# Altium PCB main_old.PcbDoc (part 10 of 15)
Units mil, origin at the board's own origin, x right, y up, seen from the top; angles counter-clockwise.
Board outline 8394.55 x 5164.44 mil, 7 copper layers (Top Layer 1, Layer 2, Layer 3, Unused, Layer 4_pow, Layer 5_gnd, Bottom 6+gnd), stack 46.112 mil thick; 363 components, 409 nets, 1750 pads, 991 vias.
Unrouted connection lines stored in the file: 1.
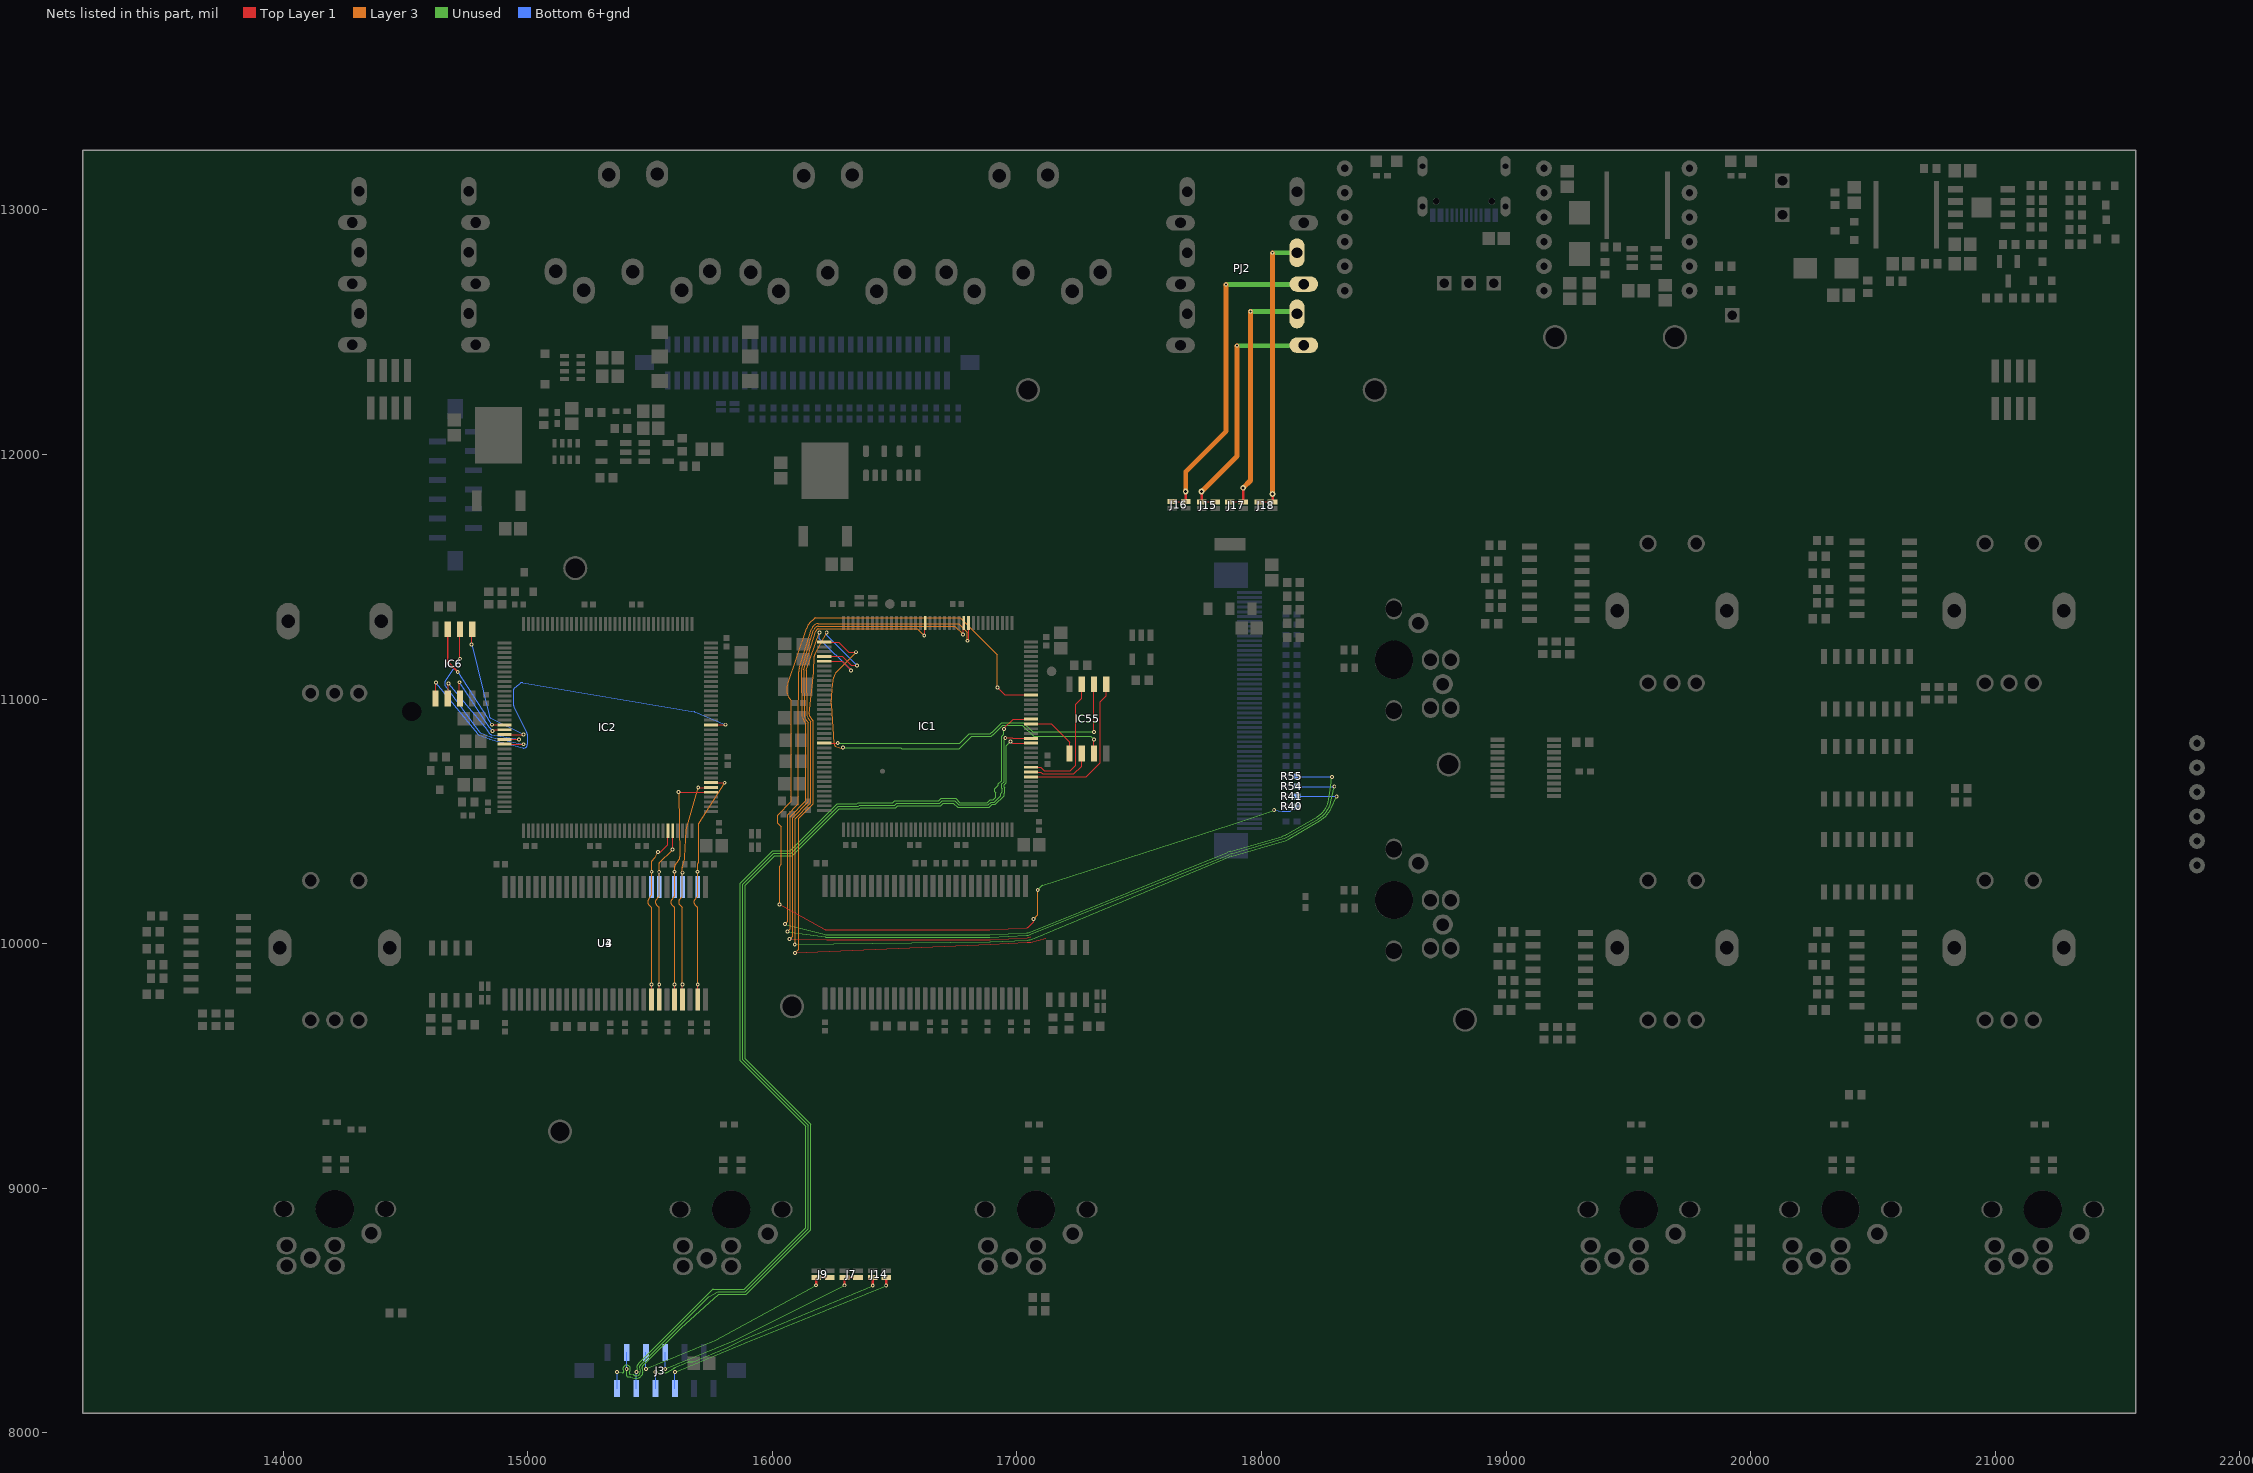
[diagram p13: the nets of this part, all layers, seen from the top]

## Via types
v1: diameter 15.75, hole 7.87, Top Layer 1 to Bottom 6+gnd, tented both sides, 923 vias
v2: diameter 27.56, hole 11.81, Top Layer 1 to Bottom 6+gnd, 45 vias
v3: diameter 23.62/23.62/23.62/23.62/23.62/23.62/23.62 (per signal layer), hole 12, Top Layer 1 to Bottom 6+gnd, tented top, 10 vias
v4: diameter 15.75, hole 7.87, Top Layer 1 to Bottom 6+gnd, 10 vias
v5: diameter 23.62/23.62/23.62/23.62/23.62/23.62/23.62 (per signal layer), hole 12, Top Layer 1 to Bottom 6+gnd, tented bottom, 3 vias

## Nets (pads, with @x,y where several pads share a name; then routed paths per layer and width w, separated by ;. In a path a pad name is that pad's centre, name@x,y a point inside that pad or via, vN(x,y) a via of type N, cw(c..) or ccw(c..) an arc to the next point about the centre after c; other vN are vias at no path point) (continued)
DD11: IC2.67 U3.47 U4.47 | length 1291.6
  Top Layer 1 w5: U3.47@15505.68,9771.4 v1@15505.68,9833.24 ; v1(15531.7,10374.63) 15542.1,10374.63 15572.76,10405.29 IC2.67@15572.82,10461.87
  Layer 3 w5: v1(15505.92,9833.49) 15505.92,10145.64 ; 15505.92,10200.79 cw(c15500.92,10200.88) 15505.15,10198.2 15492.45,10178.18 ; 15505.92,10200.83 15505.92,10293.59 v1(15506.43,10294.1) 15506.43,10336.08 ; v1(15531.7,10374.63) 15520.48,10353.18 ; 15492.45,10178.18 ccw(c15505.43,10169.94) 15494.58,10159.05 ; 15492.45,10178.18 ccw(c15505.43,10169.94) 15494.58,10159.05 ; 15492.45,10178.18 ccw(c15505.43,10169.94) 15494.58,10159.05 ; 15492.45,10178.18 ccw(c15505.43,10169.94) 15494.58,10159.05 ; 15492.45,10178.18 ccw(c15505.43,10169.94) 15494.58,10159.05 ; 15492.45,10178.18 ccw(c15505.43,10169.94) 15494.58,10159.05 ; 15492.45,10178.18 ccw(c15505.43,10169.94) 15494.58,10159.05 ; 15492.45,10178.18 ccw(c15505.43,10169.94) 15494.58,10159.05 ; 15492.45,10178.18 ccw(c15505.43,10169.94) 15494.58,10159.05 ; 15492.45,10178.18 ccw(c15505.43,10169.94) 15494.58,10159.05 ; 15492.45,10178.18 ccw(c15505.43,10169.94) 15494.58,10159.05 ; 15492.45,10178.18 ccw(c15505.43,10169.94) 15494.58,10159.05 ; 15492.45,10178.18 ccw(c15505.43,10169.94) 15494.58,10159.05 ; 15492.45,10178.18 ccw(c15505.43,10169.94) 15494.58,10159.05 ; 15492.45,10178.18 ccw(c15505.43,10169.94) 15494.58,10159.05 ; 15492.45,10178.18 ccw(c15505.43,10169.94) 15494.58,10159.05 ; 15494.58,10159.05 15504.47,10149.12 ; 15504.47,10149.12 cw(c15500.92,10145.59) 15505.92,10145.68 ; 15504.47,10149.12 cw(c15500.92,10145.59) 15505.92,10145.68 ; 15504.47,10149.12 cw(c15500.92,10145.59) 15505.92,10145.68 ; 15504.47,10149.12 cw(c15500.92,10145.59) 15505.92,10145.68 ; 15504.47,10149.12 cw(c15500.92,10145.59) 15505.92,10145.68 ; 15504.47,10149.12 cw(c15500.92,10145.59) 15505.92,10145.68 ; 15504.47,10149.12 cw(c15500.92,10145.59) 15505.92,10145.68 ; 15504.47,10149.12 cw(c15500.92,10145.59) 15505.92,10145.68 ; 15504.47,10149.12 cw(c15500.92,10145.59) 15505.92,10145.68 ; 15504.47,10149.12 cw(c15500.92,10145.59) 15505.92,10145.68 ; 15504.47,10149.12 cw(c15500.92,10145.59) 15505.92,10145.68 ; 15504.47,10149.12 cw(c15500.92,10145.59) 15505.92,10145.68 ; 15504.47,10149.12 cw(c15500.92,10145.59) 15505.92,10145.68 ; 15504.47,10149.12 cw(c15500.92,10145.59) 15505.92,10145.68 ; 15504.47,10149.12 cw(c15500.92,10145.59) 15505.92,10145.68 ; 15504.47,10149.12 cw(c15500.92,10145.59) 15505.92,10145.68 ; 15506.43,10336.08 cw(c15511.43,10336.08) 15507.87,10339.59 ; 15506.43,10336.08 cw(c15511.43,10336.08) 15507.87,10339.59 ; 15506.43,10336.08 cw(c15511.43,10336.08) 15507.87,10339.59 ; 15506.43,10336.08 cw(c15511.43,10336.08) 15507.87,10339.59 ; 15506.43,10336.08 cw(c15511.43,10336.08) 15507.87,10339.59 ; 15506.43,10336.08 cw(c15511.43,10336.08) 15507.87,10339.59 ; 15506.43,10336.08 cw(c15511.43,10336.08) 15507.87,10339.59 ; 15506.43,10336.08 cw(c15511.43,10336.08) 15507.87,10339.59 ; 15506.43,10336.08 cw(c15511.43,10336.08) 15507.87,10339.59 ; 15506.43,10336.08 cw(c15511.43,10336.08) 15507.87,10339.59 ; 15506.43,10336.08 cw(c15511.43,10336.08) 15507.87,10339.59 ; 15506.43,10336.08 cw(c15511.43,10336.08) 15507.87,10339.59 ; 15506.43,10336.08 cw(c15511.43,10336.08) 15507.87,10339.59 ; 15506.43,10336.08 cw(c15511.43,10336.08) 15507.87,10339.59 ; 15506.43,10336.08 cw(c15511.43,10336.08) 15507.87,10339.59 ; 15506.43,10336.08 cw(c15511.43,10336.08) 15507.87,10339.59 ; 15507.87,10339.59 15517.74,10349.46 ; 15517.74,10349.46 ccw(c15506.85,10360.32) 15520.48,10353.19 ; 15517.74,10349.46 ccw(c15506.85,10360.32) 15520.48,10353.19 ; 15517.74,10349.46 ccw(c15506.85,10360.32) 15520.48,10353.19 ; 15517.74,10349.46 ccw(c15506.85,10360.32) 15520.48,10353.19 ; 15517.74,10349.46 ccw(c15506.85,10360.32) 15520.48,10353.19 ; 15517.74,10349.46 ccw(c15506.85,10360.32) 15520.48,10353.19 ; 15517.74,10349.46 ccw(c15506.85,10360.32) 15520.48,10353.19 ; 15517.74,10349.46 ccw(c15506.85,10360.32) 15520.48,10353.19 ; 15517.74,10349.46 ccw(c15506.85,10360.32) 15520.48,10353.19 ; 15517.74,10349.46 ccw(c15506.85,10360.32) 15520.48,10353.19 ; 15517.74,10349.46 ccw(c15506.85,10360.32) 15520.48,10353.19 ; 15517.74,10349.46 ccw(c15506.85,10360.32) 15520.48,10353.19 ; 15517.74,10349.46 ccw(c15506.85,10360.32) 15520.48,10353.19 ; 15517.74,10349.46 ccw(c15506.85,10360.32) 15520.48,10353.19 ; 15517.74,10349.46 ccw(c15506.85,10360.32) 15520.48,10353.19 ; 15517.74,10349.46 ccw(c15506.85,10360.32) 15520.48,10353.19
  Bottom 6+gnd w5: U4.47@15505.68,10232.03 15506.43,10232.78 v1(15506.43,10294.1)
DD12: IC2.68 U3.48 U4.48 | length 1210.8
  Top Layer 1 w5: U3.48@15537.17,9771.4 v1@15537.17,9833.24 ; v1(15591.7,10384.63) 15592.07,10385 15592.07,10461.18 IC2.68@15592.33,10461.44
  Layer 3 w5: v1(15537.42,9833.49) 15537.42,10145.64 ; 15537.42,10195.56 15537.42,10293.63 v1(15537.18,10293.87) 15536.93,10294.12 15536.93,10327.78 ; v1(15591.7,10384.63) 15538.37,10331.3 ; 15525.41,10180.13 ccw(c15536.93,10169.94) 15526.06,10159.07 ; 15525.41,10180.13 ccw(c15536.93,10169.94) 15526.06,10159.07 ; 15525.41,10180.13 ccw(c15536.93,10169.94) 15526.06,10159.07 ; 15525.41,10180.13 ccw(c15536.93,10169.94) 15526.06,10159.07 ; 15525.41,10180.13 ccw(c15536.93,10169.94) 15526.05,10159.07 ; 15525.41,10180.13 ccw(c15536.93,10169.94) 15526.05,10159.07 ; 15525.41,10180.13 ccw(c15536.93,10169.94) 15526.05,10159.07 ; 15525.41,10180.13 ccw(c15536.93,10169.94) 15526.05,10159.07 ; 15525.41,10180.13 ccw(c15536.93,10169.94) 15526.05,10159.07 ; 15525.41,10180.13 ccw(c15536.93,10169.94) 15526.05,10159.07 ; 15525.41,10180.13 ccw(c15536.93,10169.94) 15526.05,10159.07 ; 15525.41,10180.13 ccw(c15536.93,10169.94) 15526.05,10159.07 ; 15525.41,10180.13 15536.16,10192.29 ; 15526.06,10159.07 15535.95,10149.17 ; 15535.95,10149.17 cw(c15532.42,10145.64) 15537.42,10145.67 ; 15535.95,10149.17 cw(c15532.42,10145.64) 15537.42,10145.67 ; 15535.95,10149.17 cw(c15532.42,10145.64) 15537.42,10145.67 ; 15535.95,10149.17 cw(c15532.42,10145.64) 15537.42,10145.67 ; 15535.95,10149.17 cw(c15532.42,10145.64) 15537.42,10145.67 ; 15535.95,10149.17 cw(c15532.42,10145.64) 15537.42,10145.67 ; 15535.95,10149.17 cw(c15532.42,10145.64) 15537.42,10145.67 ; 15535.95,10149.17 cw(c15532.42,10145.64) 15537.42,10145.67 ; 15535.95,10149.17 cw(c15532.42,10145.64) 15537.42,10145.67 ; 15535.95,10149.17 cw(c15532.42,10145.64) 15537.42,10145.67 ; 15535.95,10149.17 cw(c15532.42,10145.64) 15537.42,10145.67 ; 15535.95,10149.17 cw(c15532.42,10145.64) 15537.42,10145.67 ; 15535.95,10149.17 cw(c15532.42,10145.64) 15537.42,10145.67 ; 15535.95,10149.17 cw(c15532.42,10145.64) 15537.42,10145.67 ; 15535.95,10149.17 cw(c15532.42,10145.64) 15537.42,10145.67 ; 15535.95,10149.17 cw(c15532.42,10145.64) 15537.42,10145.67 ; 15536.16,10192.29 ccw(c15532.42,10195.6) 15537.42,10195.51 ; 15536.16,10192.29 ccw(c15532.42,10195.6) 15537.42,10195.51 ; 15536.16,10192.29 ccw(c15532.42,10195.6) 15537.42,10195.51 ; 15536.16,10192.29 ccw(c15532.42,10195.6) 15537.42,10195.51 ; 15536.16,10192.29 ccw(c15532.42,10195.6) 15537.42,10195.51 ; 15536.16,10192.29 ccw(c15532.42,10195.6) 15537.42,10195.51 ; 15536.16,10192.29 ccw(c15532.42,10195.6) 15537.42,10195.51 ; 15536.16,10192.29 ccw(c15532.42,10195.6) 15537.42,10195.51 ; 15536.16,10192.29 ccw(c15532.42,10195.6) 15537.42,10195.51 ; 15536.16,10192.29 ccw(c15532.42,10195.6) 15537.42,10195.51 ; 15536.16,10192.29 ccw(c15532.42,10195.6) 15537.42,10195.51 ; 15536.16,10192.29 ccw(c15532.42,10195.6) 15537.42,10195.51 ; 15536.16,10192.29 ccw(c15532.42,10195.6) 15537.42,10195.51 ; 15536.16,10192.29 ccw(c15532.42,10195.6) 15537.42,10195.51 ; 15536.16,10192.29 ccw(c15532.42,10195.6) 15537.42,10195.51 ; 15536.16,10192.29 ccw(c15532.42,10195.6) 15537.42,10195.51 ; 15536.93,10327.78 cw(c15541.93,10327.78) 15538.37,10331.3 ; 15536.93,10327.78 cw(c15541.93,10327.78) 15538.37,10331.29 ; 15536.93,10327.78 cw(c15541.93,10327.78) 15538.37,10331.29 ; 15536.93,10327.78 cw(c15541.93,10327.78) 15538.37,10331.29 ; 15536.93,10327.78 cw(c15541.93,10327.78) 15538.37,10331.29 ; 15536.93,10327.78 cw(c15541.93,10327.78) 15538.37,10331.29 ; 15536.93,10327.78 cw(c15541.93,10327.78) 15538.37,10331.29 ; 15536.93,10327.78 cw(c15541.93,10327.78) 15538.37,10331.29 ; 15536.93,10327.78 cw(c15541.93,10327.78) 15538.37,10331.29 ; 15536.93,10327.78 cw(c15541.93,10327.78) 15538.37,10331.29 ; 15536.93,10327.78 cw(c15541.93,10327.78) 15538.37,10331.29 ; 15536.93,10327.78 cw(c15541.93,10327.78) 15538.37,10331.29 ; 15536.93,10327.78 cw(c15541.93,10327.78) 15538.37,10331.29 ; 15536.93,10327.78 cw(c15541.93,10327.78) 15538.37,10331.29 ; 15536.93,10327.78 cw(c15541.93,10327.78) 15538.37,10331.29 ; 15536.93,10327.78 cw(c15541.93,10327.78) 15538.37,10331.29
  Bottom 6+gnd w5: U4.48@15537.18,10232.03 v1(15537.18,10293.87)
DD13: IC2.77 U3.50 U4.50 | length 1358.1
  Top Layer 1 w5: U3.50@15600.16,9771.4 v1@15600.16,9833.24 ; v1(15616.7,10619.63) 15617.11,10619.21 15676.37,10619.21 15676.78,10618.8 ; 15676.86,10618.88 IC2.77@15749.52,10618.88
  Layer 3 w5: v1(15600.41,9833.49) 15600.41,10145.64 ; 15600.41,10195.56 15600.41,10293.63 v1(15599.92,10294.12) 15599.92,10315.78 ; v1(15616.7,10619.63) 15622.07,10354.94 ; 15598.95,10149.12 cw(c15595.41,10145.59) 15600.41,10145.68 ; 15598.95,10149.12 cw(c15595.41,10145.59) 15600.41,10145.68 ; 15598.95,10149.12 cw(c15595.41,10145.59) 15600.41,10145.68 ; 15598.95,10149.12 cw(c15595.41,10145.59) 15600.41,10145.68 ; 15598.95,10149.12 cw(c15595.41,10145.59) 15600.41,10145.68 ; 15598.95,10149.12 cw(c15595.41,10145.59) 15600.41,10145.68 ; 15598.95,10149.12 cw(c15595.41,10145.59) 15600.41,10145.68 ; 15598.95,10149.12 cw(c15595.41,10145.59) 15600.41,10145.68 ; 15598.95,10149.12 cw(c15595.41,10145.59) 15600.41,10145.68 ; 15598.95,10149.12 cw(c15595.41,10145.59) 15600.41,10145.68 ; 15598.95,10149.12 cw(c15595.41,10145.59) 15600.41,10145.68 ; 15598.95,10149.12 cw(c15595.41,10145.59) 15600.41,10145.68 ; 15598.95,10149.12 cw(c15595.41,10145.59) 15600.41,10145.68 ; 15598.95,10149.12 cw(c15595.41,10145.59) 15600.41,10145.68 ; 15598.95,10149.12 cw(c15595.41,10145.59) 15600.41,10145.68 ; 15598.95,10149.12 cw(c15595.41,10145.59) 15600.41,10145.68 ; 15598.95,10149.12 15589.03,10159.1 cw(c15599.92,10169.94) 15588.4,10180.12 15599.16,10192.29 ; 15599.16,10192.29 ccw(c15595.41,10195.6) 15600.41,10195.51 ; 15599.16,10192.29 ccw(c15595.41,10195.6) 15600.41,10195.51 ; 15599.16,10192.29 ccw(c15595.41,10195.6) 15600.41,10195.51 ; 15599.16,10192.29 ccw(c15595.41,10195.6) 15600.41,10195.51 ; 15599.16,10192.29 ccw(c15595.41,10195.6) 15600.41,10195.51 ; 15599.16,10192.29 ccw(c15595.41,10195.6) 15600.41,10195.51 ; 15599.16,10192.29 ccw(c15595.41,10195.6) 15600.41,10195.51 ; 15599.16,10192.29 ccw(c15595.41,10195.6) 15600.41,10195.51 ; 15599.16,10192.29 ccw(c15595.41,10195.6) 15600.41,10195.51 ; 15599.16,10192.29 ccw(c15595.41,10195.6) 15600.41,10195.51 ; 15599.16,10192.29 ccw(c15595.41,10195.6) 15600.41,10195.51 ; 15599.16,10192.29 ccw(c15595.41,10195.6) 15600.41,10195.51 ; 15599.16,10192.29 ccw(c15595.41,10195.6) 15600.41,10195.51 ; 15599.16,10192.29 ccw(c15595.41,10195.6) 15600.41,10195.51 ; 15599.16,10192.29 ccw(c15595.41,10195.6) 15600.41,10195.51 ; 15599.16,10192.29 ccw(c15595.41,10195.6) 15600.41,10195.51 ; 15599.92,10315.78 cw(c15604.92,10315.78) 15600.79,10318.59 ; 15599.92,10315.78 cw(c15604.92,10315.78) 15600.79,10318.59 ; 15599.92,10315.78 cw(c15604.92,10315.78) 15600.79,10318.59 ; 15599.92,10315.78 cw(c15604.92,10315.78) 15600.79,10318.59 ; 15599.92,10315.78 cw(c15604.92,10315.78) 15600.79,10318.59 ; 15599.92,10315.78 cw(c15604.92,10315.78) 15600.79,10318.59 ; 15599.92,10315.78 cw(c15604.92,10315.78) 15600.79,10318.59 ; 15599.92,10315.78 cw(c15604.92,10315.78) 15600.79,10318.59 ; 15599.92,10315.78 cw(c15604.92,10315.78) 15600.79,10318.59 ; 15599.92,10315.78 cw(c15604.92,10315.78) 15600.79,10318.59 ; 15599.92,10315.78 cw(c15604.92,10315.78) 15600.79,10318.59 ; 15599.92,10315.78 cw(c15604.92,10315.78) 15600.79,10318.59 ; 15599.92,10315.78 cw(c15604.92,10315.78) 15600.79,10318.59 ; 15599.92,10315.78 cw(c15604.92,10315.78) 15600.79,10318.59 ; 15599.92,10315.78 cw(c15604.92,10315.78) 15600.79,10318.59 ; 15599.92,10315.78 cw(c15604.92,10315.78) 15600.79,10318.59 ; 15600.79,10318.59 15619.41,10345.98 ; 15619.41,10345.98 ccw(c15606.7,10354.63) 15622.07,10354.94 ; 15619.41,10345.98 ccw(c15606.7,10354.63) 15622.07,10354.94 ; 15619.41,10345.98 ccw(c15606.7,10354.63) 15622.07,10354.94 ; 15619.41,10345.98 ccw(c15606.7,10354.63) 15622.07,10354.94 ; 15619.41,10345.98 ccw(c15606.7,10354.63) 15622.07,10354.94 ; 15619.41,10345.98 ccw(c15606.7,10354.63) 15622.07,10354.94 ; 15619.41,10345.98 ccw(c15606.7,10354.63) 15622.07,10354.94 ; 15619.41,10345.98 ccw(c15606.7,10354.63) 15622.07,10354.94 ; 15619.41,10345.98 ccw(c15606.7,10354.63) 15622.07,10354.94 ; 15619.41,10345.98 ccw(c15606.7,10354.63) 15622.07,10354.94 ; 15619.41,10345.98 ccw(c15606.7,10354.63) 15622.07,10354.94 ; 15619.41,10345.98 ccw(c15606.7,10354.63) 15622.07,10354.94 ; 15619.41,10345.98 ccw(c15606.7,10354.63) 15622.07,10354.94 ; 15619.41,10345.98 ccw(c15606.7,10354.63) 15622.07,10354.94 ; 15619.41,10345.98 ccw(c15606.7,10354.63) 15622.07,10354.94 ; 15619.41,10345.98 ccw(c15606.7,10354.63) 15622.07,10354.94
  Bottom 6+gnd w5: U4.50@15600.16,10232.03 v1@15600.16,10293.87
DD14: IC2.78 U3.51 U4.51 | length 1106.9
  Top Layer 1 w5: U3.51@15631.66,9771.4 v1@15631.66,9833.24 ; v1@15697.01,10638.41 IC2.78@15749.3,10638.41
  Layer 3 w5: v1(15631.91,9833.49) 15631.91,10145.64 ; 15631.91,10195.56 v1(15631.91,10290.22) 15631.91,10311.14 cw(c15636.91,10311.14) 15632.07,10312.4 15640.88,10345.53 ccw(c15606.7,10354.63) 15642.04,10353.12 15646.74,10463.17 ; 15646.74,10463.2 cw(c15651.73,10462.93) 15646.75,10463.3 15646.77,10463.62 cw(c15661.73,10462.47) 15647.31,10466.62 v1(15696.78,10638.17) ; 15630.45,10149.12 cw(c15626.91,10145.59) 15631.91,10145.68 ; 15630.45,10149.12 cw(c15626.91,10145.59) 15631.91,10145.68 ; 15630.45,10149.12 cw(c15626.91,10145.59) 15631.91,10145.68 ; 15630.45,10149.12 cw(c15626.91,10145.59) 15631.91,10145.68 ; 15630.45,10149.12 cw(c15626.91,10145.59) 15631.91,10145.68 ; 15630.45,10149.12 cw(c15626.91,10145.59) 15631.91,10145.68 ; 15630.45,10149.12 cw(c15626.91,10145.59) 15631.91,10145.68 ; 15630.45,10149.12 cw(c15626.91,10145.59) 15631.91,10145.68 ; 15630.45,10149.12 cw(c15626.91,10145.59) 15631.91,10145.68 ; 15630.45,10149.12 cw(c15626.91,10145.59) 15631.91,10145.68 ; 15630.45,10149.12 cw(c15626.91,10145.59) 15631.91,10145.68 ; 15630.45,10149.12 cw(c15626.91,10145.59) 15631.91,10145.68 ; 15630.45,10149.12 cw(c15626.91,10145.59) 15631.91,10145.68 ; 15630.45,10149.12 cw(c15626.91,10145.59) 15631.91,10145.68 ; 15630.45,10149.12 cw(c15626.91,10145.59) 15631.91,10145.68 ; 15630.45,10149.12 cw(c15626.91,10145.59) 15631.91,10145.68 ; 15630.45,10149.12 15620.52,10159.1 cw(c15631.42,10169.94) 15619.89,10180.12 15630.65,10192.29 ; 15630.65,10192.29 ccw(c15626.91,10195.6) 15631.91,10195.51 ; 15630.65,10192.29 ccw(c15626.91,10195.6) 15631.91,10195.51 ; 15630.65,10192.29 ccw(c15626.91,10195.6) 15631.91,10195.51 ; 15630.65,10192.29 ccw(c15626.91,10195.6) 15631.91,10195.51 ; 15630.65,10192.29 ccw(c15626.91,10195.6) 15631.91,10195.51 ; 15630.65,10192.29 ccw(c15626.91,10195.6) 15631.91,10195.51 ; 15630.65,10192.29 ccw(c15626.91,10195.6) 15631.91,10195.51 ; 15630.65,10192.29 ccw(c15626.91,10195.6) 15631.91,10195.51 ; 15630.65,10192.29 ccw(c15626.91,10195.6) 15631.91,10195.51 ; 15630.65,10192.29 ccw(c15626.91,10195.6) 15631.91,10195.51 ; 15630.65,10192.29 ccw(c15626.91,10195.6) 15631.91,10195.51 ; 15630.65,10192.29 ccw(c15626.91,10195.6) 15631.91,10195.51 ; 15630.65,10192.29 ccw(c15626.91,10195.6) 15631.91,10195.51 ; 15630.65,10192.29 ccw(c15626.91,10195.6) 15631.91,10195.51 ; 15630.65,10192.29 ccw(c15626.91,10195.6) 15631.91,10195.51 ; 15630.65,10192.29 ccw(c15626.91,10195.6) 15631.91,10195.51
  Bottom 6+gnd w5: U4.51@15631.66,10232.03 15631.91,10232.28 v1(15631.91,10290.22)
DD15: IC2.79 U3.53 U4.53 | length 1158
  Top Layer 1 w5: U3.53@15694.65,9771.46 v1@15694.65,9833.24 ; IC2.79@15749.52,10658.25 15749.65,10658.06 15804.75,10658.06 v1(15804.94,10657.87)
  Layer 3 w5: v1(15694.9,9833.49) 15694.9,10145.64 ; 15694.9,10195.56 15694.9,10293.63 v1(15694.41,10294.12) 15694.41,10327.34 15699.8,10332.73 15699.8,10491.51 cw(c15704.8,10491.51) 15700.58,10494.2 v1(15804.94,10657.87) ; 15693.44,10149.12 cw(c15689.9,10145.59) 15694.9,10145.68 ; 15693.44,10149.12 cw(c15689.9,10145.59) 15694.9,10145.68 ; 15693.44,10149.12 cw(c15689.9,10145.59) 15694.9,10145.68 ; 15693.44,10149.12 cw(c15689.9,10145.59) 15694.9,10145.68 ; 15693.44,10149.12 cw(c15689.9,10145.59) 15694.9,10145.68 ; 15693.44,10149.12 cw(c15689.9,10145.59) 15694.9,10145.68 ; 15693.44,10149.12 cw(c15689.9,10145.59) 15694.9,10145.68 ; 15693.44,10149.12 cw(c15689.9,10145.59) 15694.9,10145.68 ; 15693.44,10149.12 cw(c15689.9,10145.59) 15694.9,10145.68 ; 15693.44,10149.12 cw(c15689.9,10145.59) 15694.9,10145.68 ; 15693.44,10149.12 cw(c15689.9,10145.59) 15694.9,10145.68 ; 15693.44,10149.12 cw(c15689.9,10145.59) 15694.9,10145.68 ; 15693.44,10149.12 cw(c15689.9,10145.59) 15694.9,10145.68 ; 15693.44,10149.12 cw(c15689.9,10145.59) 15694.9,10145.68 ; 15693.44,10149.12 cw(c15689.9,10145.59) 15694.9,10145.68 ; 15693.44,10149.12 cw(c15689.9,10145.59) 15694.9,10145.68 ; 15693.44,10149.12 15683.51,10159.1 cw(c15694.41,10169.94) 15682.89,10180.12 15693.64,10192.29 ; 15693.64,10192.29 ccw(c15689.9,10195.6) 15694.9,10195.51 ; 15693.64,10192.29 ccw(c15689.9,10195.6) 15694.9,10195.51 ; 15693.64,10192.29 ccw(c15689.9,10195.6) 15694.9,10195.51 ; 15693.64,10192.29 ccw(c15689.9,10195.6) 15694.9,10195.51 ; 15693.64,10192.29 ccw(c15689.9,10195.6) 15694.9,10195.51 ; 15693.64,10192.29 ccw(c15689.9,10195.6) 15694.9,10195.51 ; 15693.64,10192.29 ccw(c15689.9,10195.6) 15694.9,10195.51 ; 15693.64,10192.29 ccw(c15689.9,10195.6) 15694.9,10195.51 ; 15693.64,10192.29 ccw(c15689.9,10195.6) 15694.9,10195.51 ; 15693.64,10192.29 ccw(c15689.9,10195.6) 15694.9,10195.51 ; 15693.64,10192.29 ccw(c15689.9,10195.6) 15694.9,10195.51 ; 15693.64,10192.29 ccw(c15689.9,10195.6) 15694.9,10195.51 ; 15693.64,10192.29 ccw(c15689.9,10195.6) 15694.9,10195.51 ; 15693.64,10192.29 ccw(c15689.9,10195.6) 15694.9,10195.51 ; 15693.64,10192.29 ccw(c15689.9,10195.6) 15694.9,10195.51 ; 15693.64,10192.29 ccw(c15689.9,10195.6) 15694.9,10195.51
  Bottom 6+gnd w5: U4.53@15694.65,10232.03 v1@15694.65,10293.87
DISP_CLK_3: J3.7 J7.1 J7.3 | length 964.1
  Top Layer 1 w10: v1@16294.88,8603.3 J7.1@16294.88,8635.04 J7.3@16350,8635.04
  Unused w5: v1(15561.75,8260.95) 15845.51,8378.94 v1(16295.11,8603.07)
  Bottom 6+gnd w5: v1(15561.75,8260.95) 15561.75,8276.49 15561.87,8276.61 J3.7@15561.87,8328.46
DISP_DI_3: J3.5 J9.1 J9.3 | length 931.2
  Top Layer 1 w10: v1(16178.89,8603.19) 16178.66,8603.42 J9.3@16178.66,8635.16 J9.1@16233.78,8635.16
  Unused w5: v1(15483.01,8260.95) 15766.77,8378.94 v1(16178.89,8603.19)
  Bottom 6+gnd w5: v1(15483.01,8260.95) 15483.01,8276.49 15483.13,8276.61 J3.5@15483.13,8328.46
DISP_DO_3: J3.6 J14.1 | length 1062.5
  Top Layer 1 w10: J14.1@16410,8635.04 16410.23,8634.81 v1(16410.23,8601.85)
  Unused w5: v1(15522.62,8248.34) 15560.65,8245.62 ccw(c15561.75,8260.95) 15569.44,8247.64 15593.66,8261.65 cw(c15601.36,8248.34) 15597.47,8263.21 ccw(c15596.19,8268.04) 15599.7,8264.48 15601.42,8266.21 cw(c15604.94,8262.66) 15603.02,8267.27 15656.71,8289.61 cw(c15658.65,8285) 15658.65,8290 15674.51,8290 ccw(c15674.51,8295) 15676.43,8290.38 15813.87,8347.53 ccw(c15811.95,8352.15) 15814.2,8347.69 15879.2,8380.52 v1(16410.23,8601.85)
  Bottom 6+gnd w5: J3.6@15522.5,8180.83 15522.5,8232.68 15522.62,8232.8 v1(15522.62,8248.34)
DISP_NSS_3: J3.8 J14.3 | length 1034.4
  Top Layer 1 w10: J14.3@16465.12,8635.04 16465.35,8634.81 v1(16465.35,8601.85)
  Unused w5: v1(15601.36,8248.34) 15885.12,8366.33 v1(16465.35,8601.85)
  Bottom 6+gnd w5: J3.8@15601.24,8180.83 15601.24,8232.68 15601.36,8232.8 v1(15601.36,8248.34)
EXPR1_L_11: J15.2 J15.4 PJ2.26 | length 1027.2
  Top Layer 1 w5: J15.2@17755,11806.38 J15.4@17810.12,11806.38
  Top Layer 1 w10: J15.2@17755,11806.38 v3(17755,11848.82)
  Unused w20: v1(17900,12445) 18170.47,12445 PJ2.26@18172.56,12447.09
  Layer 3 w20: v3(17755,11848.82) 17900,11993.82 v1(17900,12445)
EXPR1_R_11: J16.2 J16.4 PJ2.24 | length 1329.3
  Top Layer 1 w5: J16.2@17634.88,11807.6 J16.4@17690,11807.6
  Top Layer 1 w10: J16.4@17690,11807.6 v3(17690,11848.82)
  Unused w20: v1(17855,12695) 18170.47,12695 PJ2.24@18172.56,12697.09
  Layer 3 w20: v3(17690,11848.82) 17690,11930 17855,12095 v1(17855,12695)
EXPR2_L_11: J17.2 J17.4 PJ2.6 | length 1040.4
  Top Layer 1 w5: J17.2@17870,11806.38 J17.4@17925.12,11806.38
  Top Layer 1 w10: v3(17925,11863.82) 17925,11806.5 J17.4@17925.12,11806.38
  Unused w20: v1(17955,12585) 18135,12585 PJ2.6@18145,12575
  Layer 3 w20: v3(17925,11863.82) 17955,11893.82 v1(17955,12585)
EXPR2_R_11: J18.2 J18.4 PJ2.4 | length 1173.8
  Top Layer 1 w5: J18.2@17990,11806.38 J18.4@18045.12,11806.38
  Top Layer 1 w10: v3(18045,11838.82) 18045,11806.5 J18.4@18045.12,11806.38
  Unused w20: v1(18045,12825) PJ2.4@18145,12825
  Layer 3 w20: v3(18045,11838.82) v1(18045,12825)
FLASH_CLK_6: IC1.22 IC55.6 | length 1347.7
  Top Layer 1 w5: IC1.22@16212.24,10819.92 v1@16267.13,10819.92 ; v1(17314.79,10865.88) 17314.79,11060.34 IC55.6@17315,11060.55
  Unused w5: v1(16267.2,10819.85) 16766.03,10819.85 16804.7,10858.51 16890.31,10858.51 16896.84,10865.04 16898.64,10865.04 16937.43,10903.82 17026.5,10903.82 17064.44,10865.88 v1(17314.79,10865.88)
FLASH_CLK_7: IC2.22 IC6.6 | length 753
  Top Layer 1 w5: IC6.6@14722.62,11285.63 14722.62,11165.84 v1(14723.34,11165.12) ; IC2.22@14904,10815.73 14904.24,10815.49 14982.48,10815.49 v1(14982.71,10815.26)
  Bottom 6+gnd w5: v1(14723.34,11165.12) 14662.16,11072.28 ccw(c14675,11063.82) 14662.62,11054.71 14800.58,10867.17 ccw(c14812.96,10876.28) 14807.09,10862.08 14845.63,10846.14 ccw(c14855.33,10869.59) 14849.81,10844.82 14959.99,10820.25 ; 14960.03,10820.24 v1(14982.71,10815.26)
FLASH_CS_6: IC1.91 IC55.1 | length 235
  Top Layer 1 w5: IC1.91@17057.77,10898.65 17140.17,10898.65 17215,10823.82 IC55.1@17215,10777.09
FLASH_CS_7: IC2.91 IC6.1 | length 1752.3
  Top Layer 1 w5: IC6.1@14622.62,11002.16 14624.2,11003.74 v1(14624.2,11067.29) ; IC2.91@15749.52,10894.47 15749.91,10894.86 15807.94,10894.86 v1(15808.33,10895.26)
  Bottom 6+gnd w5: v1(14624.2,11067.29) 14793.31,10860.23 ccw(c14812.96,10876.28) 14803.27,10852.83 14841.81,10836.9 ccw(c14855.33,10869.59) 14846.3,10835.39 14978.79,10800.39 ccw(c14982.71,10815.26) 14998.09,10815.26 14998.09,10855.26 ccw(c14982.71,10855.26) 14996.43,10862.21 14942.99,10967.68 cw(c14956.7,10974.63) 14941.33,10974.27 14940.12,11032.34 cw(c14955.49,11032.66) 14945.1,11043.99 14966.24,11063.37 cw(c14976.62,11052.03) 14979.18,11067.19 15679.45,10948.9 cw(c15676.78,10933.76) 15682.72,10947.94 v1(15808.33,10895.26)
FLASH_D0_6: IC1.80 IC55.5 | length 637.8
  Top Layer 1 w5: IC1.80@17057.76,10682.13 17283.31,10682.13 17340.9,10739.71 17340.9,10989.71 17365,11013.82 IC55.5@17365,11060.55
FLASH_D0_7: IC2.20 IC6.5 | length 604.6
  Top Layer 1 w5: v1(14770,11223.82) 14770,11283.01 IC6.5@14772.62,11285.63 ; IC2.20@14904,10855.1 14904.08,10855.18 14982.63,10855.18 v1(14982.71,10855.26)
  Bottom 6+gnd w5: v1(14770,11223.82) 14841.92,10930.97 ccw(c14856.85,10934.67) 14850.03,10920.89 v1(14982.71,10855.26)
FLASH_D1_6: IC1.81 IC55.2 | length 274.5
  Top Layer 1 w5: IC1.81@17057.76,10701.81 17098.22,10701.81 17105.9,10694.12 17232.79,10694.12 17265,10726.33 IC55.2@17265,10777.09
FLASH_D1_7: IC2.21 IC6.2 | length 509.9
  Top Layer 1 w5: IC6.2@14672.62,11002.16 14675,11004.54 v1(14675,11063.82) ; IC2.21@14904,10835.42 14904.08,10835.34 v1(14963.33,10835.26) v1(14963.33,10835.26)
  Bottom 6+gnd w5: v1(14675,11063.82) 14824.72,10886.19 cw(c14812.96,10876.28) 14825.52,10885.15 14842.77,10860.72 ccw(c14855.33,10869.59) 14852.7,10854.44 v1(14963.33,10835.26)
FLASH_D2_6: IC1.1 IC55.3 | length 1753.9
  Top Layer 1 w5: IC1.1@16212.24,11233.31 16271.62,11233.31 16313.09,11191.83 v1(16342.09,11191.83) ; IC55.3@17315,10777.09 17315,10834.31 v1(17315.08,10834.39)
  Unused w5: v1(16289.09,10801.51) 16525.54,10801.51 16529.85,10797.2 16763.39,10797.2 16814.7,10848.51 16894.46,10848.51 16900.98,10855.04 16902.79,10855.04 16941.57,10893.82 17022.35,10893.82 17067.66,10848.51 17300.96,10848.51 v1(17315.08,10834.39)
  Layer 3 w5: 16244.93,11041.22 16240.76,10981.06 ccw(c16276.06,10978.64) 16240.77,10976.15 16251.87,10818.72 ccw(c16267.2,10819.85) 16262.44,10805.23 16287.09,10797.2 16287.09,10799.5 v1(16289.09,10801.51) ; 16245.17,11043.65 16250.91,11090.1 cw(c16286.01,11085.73) 16260.95,11110.69 v1(16342.09,11191.83)
FLASH_D2_7: IC2.19 IC6.3 | length 364.3
  Top Layer 1 w5: v1(14720,11068.82) 14720,11004.79 IC6.3@14722.62,11002.16 ; v1@14852.87,10864.22 14863.44,10874.79 IC2.19@14904,10874.79
  Bottom 6+gnd w5: v1(14720,11068.82) 14840.51,10886.77 ccw(c14853.33,10895.26) 14841.75,10885.15 v1(14855.33,10869.59)
FLASH_D3_6: IC1.82 IC55.7 | length 539.2
  Top Layer 1 w5: IC1.82@17057.76,10721.5 17097.8,10721.5 17112.09,10707.2 17218.39,10707.2 17240,10728.82 17240,10978.82 17265,11003.82 IC55.7@17265,11060.55
FLASH_D3_7: IC2.18 IC6.7 | length 499.7
  Top Layer 1 w5: v1(14853.33,10895.26) 14853.73,10894.86 14903.61,10894.86 IC2.18@14904,10894.47
  Top Layer 1 w8: IC6.7@14672.62,11285.63 14672.62,11151.91 v1(14713.44,11111.09)
  Bottom 6+gnd w5: v1(14713.44,11111.09) 14835.49,10920.97 ccw(c14856.85,10934.67) 14836.01,10920.2 v1(14853.33,10895.26)
FMC_A21_RS: IC1.4 | length 2737
  Top Layer 1 w5: v1(16092.09,9962.2) 16890.36,9996.9 ; IC1.4@16212.24,11174.25 16286.12,11174.25 16322.88,11137.5 v1(16345.4,11137.5) ; 17117.91,10021.37 ccw(c17119.29,10014) 17117.53,10021.29 17055.55,10006.66 cw(c17038.25,10080.02) 17042.2,10004.75 16890.95,9996.93 ; 16890.36,9996.9 ccw(c16887.09,10072.2) 16890.95,9996.93 ; 16890.36,9996.9 ccw(c16887.09,10072.2) 16890.95,9996.93 ; 16890.36,9996.9 ccw(c16887.09,10072.2) 16890.95,9996.93 ; 16890.36,9996.9 ccw(c16887.09,10072.2) 16890.95,9996.93 ; 16890.36,9996.9 ccw(c16887.09,10072.2) 16890.95,9996.93 ; 16890.36,9996.9 ccw(c16887.09,10072.2) 16890.95,9996.93 ; 16890.36,9996.9 ccw(c16887.09,10072.2) 16890.95,9996.93 ; 16890.36,9996.9 ccw(c16887.09,10072.2) 16890.95,9996.93 ; 16890.36,9996.9 ccw(c16887.09,10072.2) 16890.95,9996.93 ; 16890.36,9996.9 ccw(c16887.09,10072.2) 16890.95,9996.93 ; 16890.36,9996.9 ccw(c16887.09,10072.2) 16890.95,9996.93 ; 16890.36,9996.9 ccw(c16887.09,10072.2) 16890.95,9996.93 ; 16890.36,9996.9 ccw(c16887.09,10072.2) 16890.95,9996.93 ; 16890.36,9996.9 ccw(c16887.09,10072.2) 16890.95,9996.93 ; 16890.36,9996.9 ccw(c16887.09,10072.2) 16890.95,9996.93 ; 16890.36,9996.9 ccw(c16887.09,10072.2) 16890.95,9996.93
  Layer 3 w5: v1(16092.09,9962.2) 16107.8,9977.91 16107.8,10512.06 16166.87,10571.13 16166.87,10908.63 ; 16166.87,10908.68 ccw(c16161.87,10908.59) 16165.91,10911.54 16152.58,10929.76 cw(c16165,10938.82) 16149.72,10940.49 16168.57,11110.57 ccw(c16153.3,11112.31) 16168.66,11111.82 ; v1(16222.09,11272.2) 16172.53,11182.21 ccw(c16185.68,11175) 16170.69,11175.47 16168.66,11111.82 ; 16168.57,11110.58 ccw(c16153.3,11112.31) 16168.66,11111.82 ; 16168.57,11110.58 ccw(c16153.3,11112.31) 16168.66,11111.82 ; 16168.57,11110.58 ccw(c16153.3,11112.31) 16168.66,11111.82 ; 16168.57,11110.58 ccw(c16153.3,11112.31) 16168.66,11111.82
  Bottom 6+gnd w5: v1(16222.09,11272.2) 16222.09,11260.81 v1(16345.4,11137.5)
FMC_A22_RS: IC1.5 R41.2 | length 4455.2
  Top Layer 1 w5: IC1.5@16212.24,11154.57 16284.72,11154.57 v1(16322.09,11117.2)
  Unused w5: v1(16091.41,9996.73) 16888,10006.84 16890.43,10006.92 17041.62,10014.74 ccw(c17038.25,10080.02) 17060.36,10018.51 ccw(c17056.94,10027.9) 17060.77,10018.67 17868.71,10354.46 cw(c17906.89,10262.58) 17879.24,10358.16 18087.94,10418.54 ccw(c18056.25,10529.09) 18114.09,10429.69 18238.57,10502.34 ccw(c18180.42,10601.98) 18285.34,10553.99 v1(18307.4,10602.23)
  Layer 3 w5: v1(16091.41,9996.73) 16092.42,9997.75 16092.42,10510.82 16156.87,10575.27 16156.87,10904.54 ; 16138.75,11117.27 v1(16192.09,11272.2) ; 16138.75,11117.28 ccw(c16153.3,11112.31) 16137.92,11112.17 16139.63,10938.64 ; 16139.63,10938.64 ccw(c16165,10938.82) 16144.17,10924.34 ; 16139.63,10938.64 ccw(c16165,10938.82) 16144.17,10924.34 ; 16139.63,10938.64 ccw(c16165,10938.82) 16144.17,10924.34 ; 16139.63,10938.64 ccw(c16165,10938.82) 16144.17,10924.34 ; 16139.63,10938.64 ccw(c16165,10938.82) 16144.17,10924.34 ; 16139.63,10938.64 ccw(c16165,10938.82) 16144.17,10924.34 ; 16139.63,10938.64 ccw(c16165,10938.82) 16144.17,10924.34 ; 16139.63,10938.64 ccw(c16165,10938.82) 16144.17,10924.34 ; 16139.63,10938.64 ccw(c16165,10938.82) 16144.17,10924.34 ; 16139.63,10938.64 ccw(c16165,10938.82) 16144.17,10924.34 ; 16139.63,10938.64 ccw(c16165,10938.82) 16144.17,10924.34 ; 16139.63,10938.64 ccw(c16165,10938.82) 16144.17,10924.34 ; 16139.63,10938.64 ccw(c16165,10938.82) 16144.17,10924.34 ; 16139.63,10938.64 ccw(c16165,10938.82) 16144.17,10924.34 ; 16139.63,10938.64 ccw(c16165,10938.82) 16144.17,10924.34 ; 16139.63,10938.64 ccw(c16165,10938.82) 16144.17,10924.34 ; 16144.17,10924.33 16155.98,10907.3 ; 16155.98,10907.3 cw(c16151.87,10904.45) 16156.87,10904.54 ; 16155.98,10907.3 cw(c16151.87,10904.45) 16156.87,10904.54 ; 16155.98,10907.3 cw(c16151.87,10904.45) 16156.87,10904.54 ; 16155.98,10907.3 cw(c16151.87,10904.45) 16156.87,10904.54 ; 16155.98,10907.3 cw(c16151.87,10904.45) 16156.87,10904.54 ; 16155.98,10907.3 cw(c16151.87,10904.45) 16156.87,10904.54 ; 16155.98,10907.3 cw(c16151.87,10904.45) 16156.87,10904.54 ; 16155.98,10907.3 cw(c16151.87,10904.45) 16156.87,10904.54 ; 16155.98,10907.3 cw(c16151.87,10904.45) 16156.87,10904.54 ; 16155.98,10907.3 cw(c16151.87,10904.45) 16156.87,10904.54 ; 16155.98,10907.3 cw(c16151.87,10904.45) 16156.87,10904.54 ; 16155.98,10907.3 cw(c16151.87,10904.45) 16156.87,10904.54 ; 16155.98,10907.3 cw(c16151.87,10904.45) 16156.87,10904.54 ; 16155.98,10907.3 cw(c16151.87,10904.45) 16156.87,10904.54 ; 16155.98,10907.3 cw(c16151.87,10904.45) 16156.87,10904.54 ; 16155.98,10907.3 cw(c16151.87,10904.45) 16156.87,10904.54
  Bottom 6+gnd w5: v1(16192.09,11272.2) 16192.09,11247.2 v1(16322.09,11117.2) ; R41.2@18145.28,10602.19 18157.54,10602.23 v1(18307.4,10602.23)
FMC_NE1_CS: IC1.97 R40.2 | length 4660.8
  Top Layer 1 w5: v1(16029.21,10160.4) 16214.75,10058.69 ccw(c16222.09,10072.2) 16222.09,10056.83 16887.09,10056.83 ; 16887.85,10056.85 17039.04,10064.67 ccw(c17038.25,10080.02) 17046.63,10067.14 17068.29,10088.79 17068.29,10100.64 v1(17068.11,10100.81) ; v1(16919.97,11047.47) 16950.66,11016.77 IC1.97@17057.76,11016.77
  Unused w5: v1(17085,10218.82) 17098.83,10234.16 cw(c17110.25,10223.87) 17105.56,10238.51 17873.66,10487.18 ccw(c17868.92,10501.81) 17873.74,10487.21 v1(18051.86,10545.99)
  Layer 3 w5: v1(16029.21,10160.4) 16029.21,10316.32 16037.09,10324.2 16037.09,10477.2 16021.67,10492.62 16021.67,10525.93 16077.09,10581.35 16077.09,10990.13 ccw(c16072.09,10990.13) 16076.31,10992.81 16065.29,11010.17 cw(c16086.71,11023.77) 16061.34,11023.77 16061.34,11052.2 cw(c16086.71,11052.2) 16062.65,11060.27 16139.58,11289.8 cw(c16192.09,11272.2) 16152.85,11311.28 16172.33,11330.76 cw(c16175.85,11327.2) 16175.85,11332.2 16768.04,11332.2 16918.76,11181.49 16918.76,11048.67 v1(16919.97,11047.47) ; v1(17068.11,10100.81) 17085,10117.69 v1(17085,10218.82)
  Bottom 6+gnd w5: v1(18051.86,10545.99) 18084.24,10541.63 ccw(c18085.24,10549.06) 18085.24,10541.56 18114.76,10541.56 ccw(c18114.76,10549.06) 18118.72,10542.69 18133.01,10551.56 R40.2@18145.28,10560.87
FMC_NE4_CS: IC1.127 | length 2802.7
  Top Layer 1 w5: v1(16070.24,10019.05) 16221.27,10016.84 ccw(c16222.09,10072.2) 16222.09,10016.83 16887.09,10016.83 ccw(c16887.09,10072.2) 16889.9,10016.9 17041.13,10024.73 ccw(c17038.25,10080.02) 17056.94,10027.9 ; v1(16620.85,11259.98) 16622.9,11262.04 16622.9,11309.32 IC1.127@16625.16,11311.57
  Layer 3 w5: v1(16070.24,10019.05) 16082.42,10031.23 16082.42,10514.96 16146.87,10579.41 16146.87,10900.35 ; 16129.03,11119.72 ccw(c16153.3,11112.31) 16127.93,11112.09 16129.63,10938.49 ccw(c16165,10938.82) 16135.32,10919.57 16146.06,10903.03 cw(c16141.87,10900.31) 16146.87,10900.39 ; 16129.03,11119.73 16177.39,11276.73 cw(c16192.09,11272.2) 16181.28,11283.14 16184.98,11286.84 cw(c16188.54,11283.28) 16188.45,11288.28 16592.54,11288.28 v1(16620.85,11259.98)
FMC_NOE_RD: IC1.118 R55.2 | length 4606.7
  Top Layer 1 w5: v1(16797.48,11238.48) 16797.48,11241.39 16802.32,11246.23 IC1.118@16802.32,11311.57
  Unused w5: v1(16051.37,10079.87) 16213.22,10037.96 ccw(c16222.09,10072.2) 16222.09,10036.83 16887.09,10036.83 ccw(c16887.09,10072.2) 16888.89,10036.88 17040.1,10044.7 ccw(c17038.25,10080.02) 17051.47,10047.21 17862.29,10373.44 cw(c17906.89,10262.58) 17873.68,10377.37 18082.33,10437.74 ccw(c18056.25,10529.09) 18104.12,10447.03 18228.49,10519.61 ccw(c18180.42,10601.98) 18274.93,10589.22 18282.42,10644.65 v1(18287.45,10681.8)
  Layer 3 w5: v1(16051.37,10079.87) 16062.42,10090.92 16062.42,10527.54 16104.66,10569.77 ; 16104.68,10569.8 ccw(c16101.09,10573.28) 16106.09,10573.28 16106.12,10880.47 cw(c16121.5,10880.47) 16106.12,10880.55 16107.93,11112.66 cw(c16153.3,11112.31) 16109.93,11125.65 16158.28,11282.62 cw(c16192.09,11272.2) 16167.02,11297.17 16170.87,11301.01 cw(c16188.49,11283.28) 16188.49,11308.28 16761.01,11308.28 16796.39,11272.9 16796.39,11239.57 v1(16797.48,11238.48)
  Bottom 6+gnd w5: R55.2@18145.28,10684.82 18157.54,10681.98 18180.42,10681.98 ; 18180.64,10681.8 v1(18287.45,10681.8)
FMC_NWE_WE: IC1.119 R54.2 | length 4928.7
  Top Layer 1 w5: v1(16779.75,11264.24) 16781.19,11265.68 16781.19,11310.13 IC1.119@16782.64,11311.57
  Unused w5: v1(16061.74,10049.65) 16215.56,10027.3 ccw(c16222.09,10072.2) 16222.09,10026.83 16887.09,10026.83 ccw(c16887.09,10072.2) 16889.37,10026.89 17040.59,10034.71 ccw(c17038.25,10080.02) 17055.17,10037.93 17866.02,10364.16 cw(c17906.89,10262.58) 17876.46,10367.76 18085.15,10428.14 ccw(c18056.25,10529.09) 18109.16,10438.4 18233.53,10510.97 ccw(c18180.42,10601.98) 18283.19,10578.71 v1(18297.66,10642.59)
  Layer 3 w5: v1(16061.74,10049.65) 16072.42,10060.33 16072.42,10519.11 16136.87,10583.56 16136.87,10896.25 ; v1(16779.75,11264.24) 16745.71,11298.28 16188.49,11298.28 ; 16136.14,10898.77 cw(c16131.87,10896.16) 16136.87,10896.25 ; 16136.14,10898.77 cw(c16131.87,10896.16) 16136.87,10896.25 ; 16136.14,10898.77 cw(c16131.87,10896.16) 16136.87,10896.25 ; 16136.14,10898.77 cw(c16131.87,10896.16) 16136.87,10896.25 ; 16136.14,10898.77 cw(c16131.87,10896.16) 16136.87,10896.25 ; 16136.14,10898.77 cw(c16131.87,10896.16) 16136.87,10896.25 ; 16136.14,10898.77 cw(c16131.87,10896.16) 16136.87,10896.25 ; 16136.14,10898.77 cw(c16131.87,10896.16) 16136.87,10896.25 ; 16136.14,10898.77 cw(c16131.87,10896.16) 16136.87,10896.25 ; 16136.14,10898.77 cw(c16131.87,10896.16) 16136.87,10896.25 ; 16136.14,10898.77 cw(c16131.87,10896.16) 16136.87,10896.25 ; 16136.14,10898.77 cw(c16131.87,10896.16) 16136.87,10896.25 ; 16136.14,10898.77 cw(c16131.87,10896.16) 16136.87,10896.25 ; 16136.14,10898.77 cw(c16131.87,10896.16) 16136.87,10896.25 ; 16136.14,10898.77 cw(c16131.87,10896.16) 16136.87,10896.25 ; 16136.14,10898.77 cw(c16131.87,10896.16) 16136.87,10896.25 ; 16136.14,10898.77 16126.1,10915.46 cw(c16165,10938.82) 16119.63,10938.37 16117.93,11111.96 cw(c16153.3,11112.31) 16119.49,11122.72 16167.84,11279.67 ; 16167.84,11279.67 cw(c16192.09,11272.2) 16174.11,11290.11 ; 16167.84,11279.67 cw(c16192.09,11272.2) 16174.11,11290.11 ; 16167.84,11279.67 cw(c16192.09,11272.2) 16174.11,11290.11 ; 16167.84,11279.67 cw(c16192.09,11272.2) 16174.11,11290.11 ; 16167.84,11279.67 cw(c16192.09,11272.2) 16174.11,11290.11 ; 16167.84,11279.67 cw(c16192.09,11272.2) 16174.11,11290.11 ; 16167.84,11279.67 cw(c16192.09,11272.2) 16174.11,11290.11 ; 16167.84,11279.67 cw(c16192.09,11272.2) 16174.11,11290.11 ; 16167.84,11279.67 cw(c16192.09,11272.2) 16174.11,11290.11 ; 16167.84,11279.67 cw(c16192.09,11272.2) 16174.11,11290.11 ; 16167.84,11279.67 cw(c16192.09,11272.2) 16174.11,11290.11 ; 16167.84,11279.67 cw(c16192.09,11272.2) 16174.11,11290.11 ; 16167.84,11279.67 cw(c16192.09,11272.2) 16174.11,11290.11 ; 16167.84,11279.67 cw(c16192.09,11272.2) 16174.11,11290.11 ; 16167.84,11279.67 cw(c16192.09,11272.2) 16174.11,11290.11 ; 16167.84,11279.67 cw(c16192.09,11272.2) 16174.11,11290.11 ; 16174.11,11290.11 16177.92,11293.93 ; 16177.92,11293.93 cw(c16188.49,11283.28) 16188.49,11298.28 ; 16177.92,11293.93 cw(c16188.49,11283.28) 16188.49,11298.28 ; 16177.92,11293.93 cw(c16188.49,11283.28) 16188.49,11298.28 ; 16177.92,11293.93 cw(c16188.49,11283.28) 16188.49,11298.28 ; 16177.92,11293.93 cw(c16188.49,11283.28) 16188.49,11298.28 ; 16177.92,11293.93 cw(c16188.49,11283.28) 16188.49,11298.28 ; 16177.92,11293.93 cw(c16188.49,11283.28) 16188.49,11298.28 ; 16177.92,11293.93 cw(c16188.49,11283.28) 16188.49,11298.28 ; 16177.92,11293.93 cw(c16188.49,11283.28) 16188.49,11298.28 ; 16177.92,11293.93 cw(c16188.49,11283.28) 16188.49,11298.28 ; 16177.92,11293.93 cw(c16188.49,11283.28) 16188.49,11298.28 ; 16177.92,11293.93 cw(c16188.49,11283.28) 16188.49,11298.28 ; 16177.92,11293.93 cw(c16188.49,11283.28) 16188.49,11298.28 ; 16177.92,11293.93 cw(c16188.49,11283.28) 16188.49,11298.28 ; 16177.92,11293.93 cw(c16188.49,11283.28) 16188.49,11298.28 ; 16177.92,11293.93 cw(c16188.49,11283.28) 16188.49,11298.28
  Bottom 6+gnd w5: R54.2@18145.28,10643.5 18157.54,10642.59 v1(18297.66,10642.59)
FOOT1: IC1.92 J3.4 | length 4169.8
  Top Layer 1 w5: v1(16946.75,10877.25) 16946.75,10880.75 16984.35,10918.35 IC1.92@17057.76,10918.35
  Unused w5: v1(15443.88,8248.34) 15446.78,8256.61 ccw(c15442.06,8258.27) 15446.96,8259.23 15445.71,8265.59 cw(c15460.4,8268.62) 15449.05,8278.42 15457.98,8288.81 cw(c15461.77,8285.54) 15458.22,8289.06 15753.71,8584.55 cw(c15757.23,8581) 15757.23,8586 15885,8586 16137,8838 16137,9254.15 15869,9522.15 15869,10246.85 16001.15,10379 16073.16,10379 16265.33,10571.16 16345.46,10571.16 16350.61,10576.31 16492.31,10576.31 16500.19,10584.19 16679.91,10584.19 16690.78,10595.06 16748.78,10595.06 16766.85,10577 16878.15,10577 16890.35,10589.19 16903.91,10589.19 16913,10598.28 16913,10616.71 16909.19,10620.52 16909.19,10633.25 16924.49,10648.55 16924.49,10653.94 16937.04,10666.49 16937.04,10847.4 16946.75,10857.11 v1(16946.75,10877.25)
  Bottom 6+gnd w5: J3.4@15443.76,8180.83 15443.76,8232.68 15443.88,8232.8 v1(15443.88,8248.34)
FOOT2: IC1.88 J3.2 | length 4268.7
  Top Layer 1 w5: v1(16952.41,10841.03) 16953.75,10842.37 16980.37,10842.37 16983.14,10839.61 IC1.88@17057.76,10839.61
  Unused w5: v1(15365.14,8248.34) 15386.35,8245 ccw(c15387.09,8249.95) 15391.43,8252.43 15390.94,8253.29 cw(c15404.27,8260.95) 15418.23,8254.52 15414.76,8246.99 ccw(c15419.3,8244.89) 15418.49,8239.95 15431.24,8237.95 cw(c15430.45,8233.01) 15433.74,8236.78 ccw(c15443.88,8248.34) 15458.9,8251.59 15455.51,8267.58 cw(c15460.4,8268.62) 15456.61,8271.88 15465.32,8282 cw(c15469.11,8278.74) 15465.57,8282.27 15619.41,8436.11 15739.33,8556.03 cw(c15742.87,8552.49) 15740.54,8556.92 15777,8576 15889.14,8576 16147,8833.86 16147,9258.29 15879,9526.29 15879,10242.71 16005.29,10369 16077.31,10369 16269.47,10561.16 16351.02,10561.16 16356.17,10566.31 16500.17,10566.31 16508.05,10574.19 16684.05,10574.19 16694.92,10585.06 16744.64,10585.06 16762.7,10567 16882.3,10567 16894.49,10579.19 16908.05,10579.19 16933.01,10604.15 16933.01,10613.59 16939.94,10620.52 16939.94,10633.25 16938.66,10634.53 16938.66,10653.97 16947.04,10662.35 16947.04,10832.75 16952.41,10838.12 v1(16952.41,10841.03)
  Bottom 6+gnd w5: J3.2@15365.02,8180.82 15365.02,8232.67 15365.14,8232.79 v1(15365.14,8248.34)
FOOT3: IC1.87 J3.3 | length 4184
  Top Layer 1 w5: v1(16974,10827) 16981.08,10819.92 IC1.87@17057.76,10819.92
  Unused w5: v1(15404.27,8260.95) 15404.27,8233.28 ccw(c15409.27,8233.28) 15409.27,8228.28 15420.2,8228.28 cw(c15420.2,8223.28) 15421.51,8228.11 15437.24,8223.85 ccw(c15443.88,8248.34) 15438.84,8223.47 15440.84,8223.06 ccw(c15441.84,8227.96) 15441.81,8222.96 15443.88,8222.96 ccw(c15443.88,8248.34) 15463.62,8232.4 15468.89,8238.93 ccw(c15465,8242.07) 15470,8242.07 15470,8246.94 ccw(c15465,8246.94) 15469.89,8247.98 15468.7,8253.6 15466.99,8261.66 15466.32,8264.82 cw(c15471.21,8265.85) 15467.42,8269.11 15472.65,8275.19 cw(c15476.44,8271.93) 15472.88,8275.44 15626.44,8429 cw(c15629.96,8425.45) 15626.64,8429.19 15780.69,8566 15893.28,8566 16157,8829.72 16157,9262.43 15889,9530.43 15889,10238.57 16009.43,10359 16081.45,10359 16273.39,10550.94 16354.94,10550.94 16360.31,10556.31 16504.31,10556.31 16512.19,10564.19 16688.19,10564.19 16699.06,10575.06 16740.5,10575.06 16758.56,10557 16886.44,10557 16898.63,10569.19 16912.19,10569.19 16948.66,10605.66 16948.66,10615.1 16949.94,10616.38 16949.94,10637.4 16948.66,10638.67 16948.66,10649.83 16957.04,10658.2 16957.04,10810.04 v1(16974,10827)
  Bottom 6+gnd w5: v1(15404.27,8260.95) 15404.27,8276.49 15404.39,8276.61 J3.3@15404.39,8328.46